# Altium PCB carrier_board.PcbDoc (part 3 of 18)
Units mm, origin at the board's own origin, x right, y up, seen from the top; angles counter-clockwise.
Board outline 146 x 102 mm, 20 copper layers (F.Cu, F.Mask, B.Cu, B.Mask, In1.Cu, F.SilkS, In2.Cu, B.SilkS, F.Adhes, B.Adhes, F.Paste, B.Paste, Dwgs.User, Cmts.User, Eco1.User, Eco2.User, Edge.Cuts, Margin, B.CrtYd, F.CrtYd); 256 components, 384 nets, 1262 pads, 1024 vias.
Unrouted connection lines stored in the file: 117.
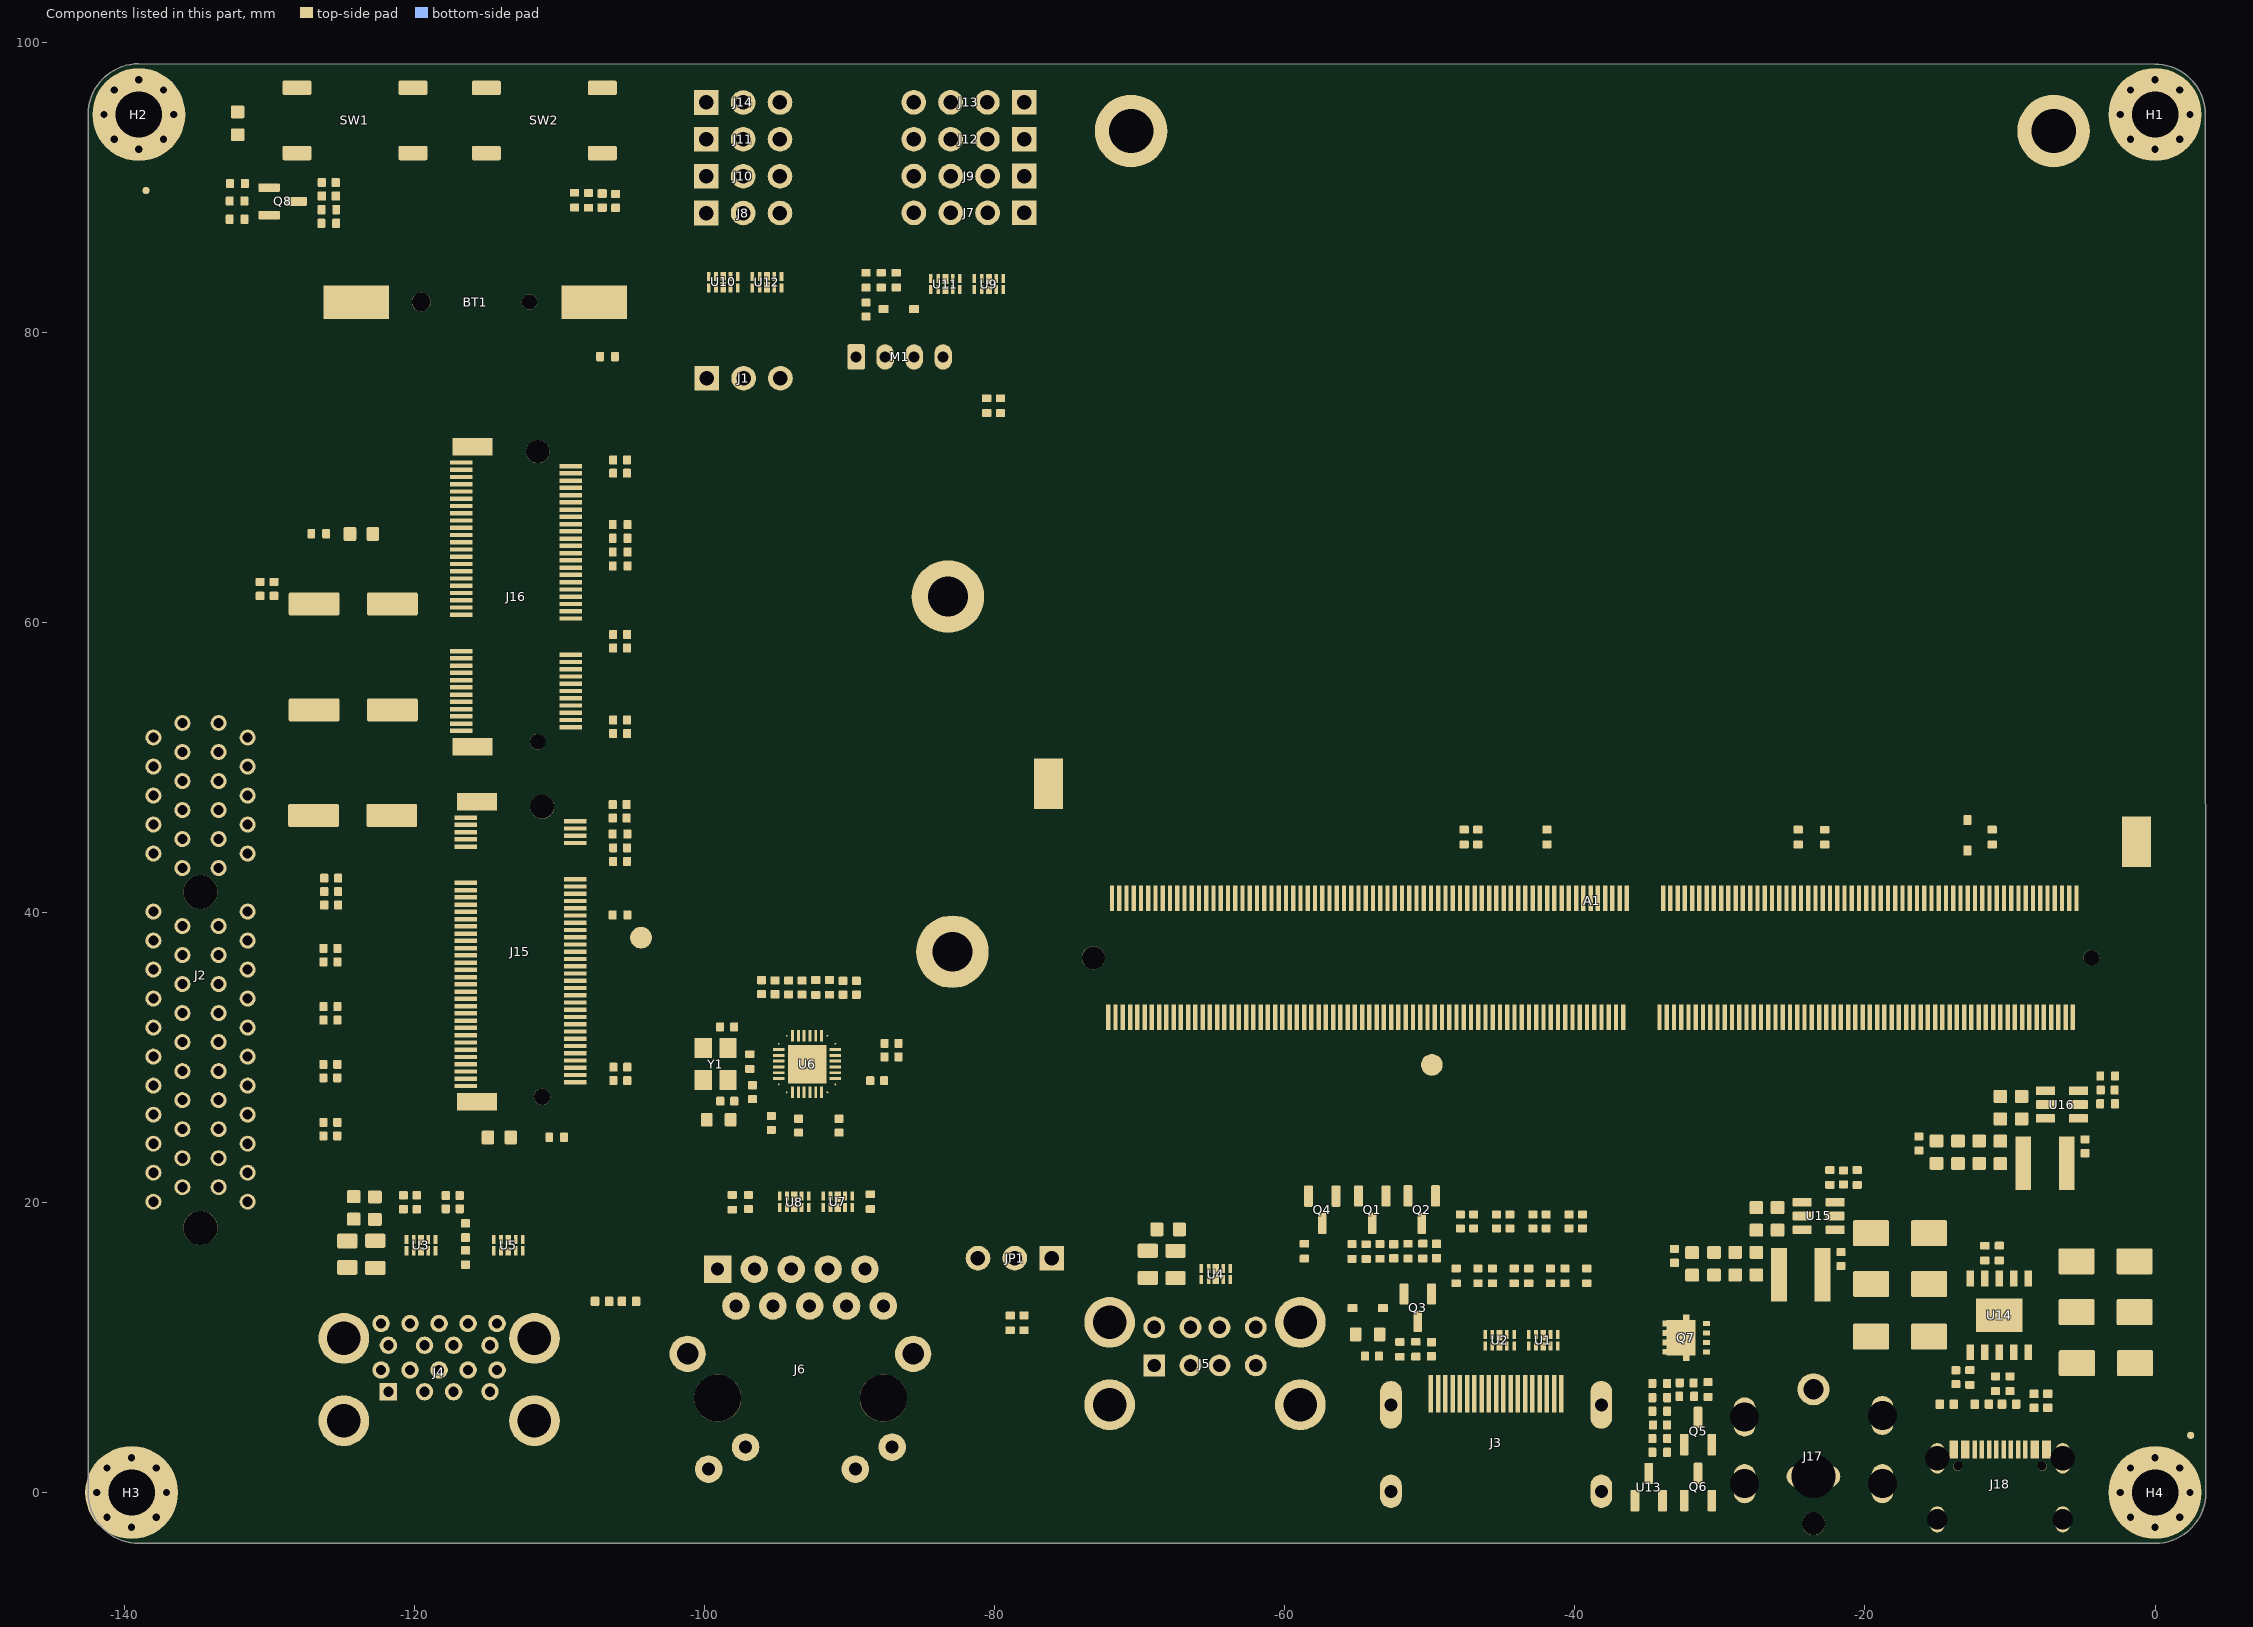
[diagram p14: the components of this part, seen from the top]

## Design rules (kind name [scope] priority, off if disabled: settings) (continued)
PolygonConnect Polygon_F.Cu-/USB2.0&USB3.0/CON_USB3_SSRX_N-2_ConnectDirect [IsNamedPolygon('F.Cu-/USB2.0&USB3.0/CON_USB3_SSRX_N-2')] p420: connectstyle=Direct reliefconductorwidth=0.254 reliefentries=4 polygonreliefangle="90 Angle" airgapwidth=0.254
PolygonConnect Polygon_F.Cu-Net-(D11-A2)-1_ConnectDirect [IsNamedPolygon('F.Cu-Net-(D11-A2)-1')] p421: connectstyle=Direct reliefconductorwidth=0.254 reliefentries=4 polygonreliefangle="90 Angle" airgapwidth=0.254
PolygonConnect Polygon_F.Cu-/HDMI/TMDS_D2--6_ConnectDirect [IsNamedPolygon('F.Cu-/HDMI/TMDS_D2--6')] p422: connectstyle=Direct reliefconductorwidth=0.254 reliefentries=4 polygonreliefangle="90 Angle" airgapwidth=0.254
PolygonConnect Polygon_F.Cu-Net-(Q7-G)-7_ConnectDirect [IsNamedPolygon('F.Cu-Net-(Q7-G)-7')] p423: connectstyle=Direct reliefconductorwidth=0.254 reliefentries=4 polygonreliefangle="90 Angle" airgapwidth=0.254
PolygonConnect "Polygon_F.Cu-/LattePanda Module/HSIO_3_RX+-2_ConnectDirect" [IsNamedPolygon('F.Cu-/LattePanda Module/HSIO_3_RX+-2')] p424: connectstyle=Direct reliefconductorwidth=0.254 reliefentries=4 polygonreliefangle="90 Angle" airgapwidth=0.254
PolygonConnect Polygon_F.Cu-Net-(D22-A)-1_ConnectDirect [IsNamedPolygon('F.Cu-Net-(D22-A)-1')] p425: connectstyle=Direct reliefconductorwidth=0.254 reliefentries=4 polygonreliefangle="90 Angle" airgapwidth=0.254
PolygonConnect Polygon_F.Cu-/USB2.0&USB3.0/CON_USB3_SSTX_N-2_ConnectDirect [IsNamedPolygon('F.Cu-/USB2.0&USB3.0/CON_USB3_SSTX_N-2')] p426: connectstyle=Direct reliefconductorwidth=0.254 reliefentries=4 polygonreliefangle="90 Angle" airgapwidth=0.254
PolygonConnect Polygon_F.Cu-/HDMI/TMDS_CK+-6_ConnectDirect [IsNamedPolygon('F.Cu-/HDMI/TMDS_CK+-6')] p427: connectstyle=Direct reliefconductorwidth=0.254 reliefentries=4 polygonreliefangle="90 Angle" airgapwidth=0.254
PolygonConnect "Polygon_F.Cu-/LattePanda Module/HSIO_0_TX+-2_ConnectDirect" [IsNamedPolygon('F.Cu-/LattePanda Module/HSIO_0_TX+-2')] p428: connectstyle=Direct reliefconductorwidth=0.254 reliefentries=4 polygonreliefangle="90 Angle" airgapwidth=0.254
PolygonConnect Polygon_F.Cu-Net-(D25-A2)-4_ConnectDirect [IsNamedPolygon('F.Cu-Net-(D25-A2)-4')] p429: connectstyle=Direct reliefconductorwidth=0.254 reliefentries=4 polygonreliefangle="90 Angle" airgapwidth=0.254
PolygonConnect "Polygon_F.Cu-/LattePanda Module/HSIO_0_TX--2_ConnectDirect" [IsNamedPolygon('F.Cu-/LattePanda Module/HSIO_0_TX--2')] p430: connectstyle=Direct reliefconductorwidth=0.254 reliefentries=4 polygonreliefangle="90 Angle" airgapwidth=0.254
PolygonConnect "Polygon_F.Cu-/LattePanda Module/HSIO_2_RX+-2_ConnectDirect" [IsNamedPolygon('F.Cu-/LattePanda Module/HSIO_2_RX+-2')] p431: connectstyle=Direct reliefconductorwidth=0.254 reliefentries=4 polygonreliefangle="90 Angle" airgapwidth=0.254
PolygonConnect Polygon_F.Cu-/USB2.0&USB3.0/CON_USB1_D_N-2_ConnectDirect [IsNamedPolygon('F.Cu-/USB2.0&USB3.0/CON_USB1_D_N-2')] p432: connectstyle=Direct reliefconductorwidth=0.254 reliefentries=4 polygonreliefangle="90 Angle" airgapwidth=0.254
PolygonConnect Polygon_F.Cu-/~{PWR_LED}{slash}~{PSON}-4_ConnectDirect [IsNamedPolygon('F.Cu-/~{PWR_LED}{slash}~{PSON}-4')] p433: connectstyle=Direct reliefconductorwidth=0.254 reliefentries=4 polygonreliefangle="90 Angle" airgapwidth=0.254
PolygonConnect Polygon_F.Cu-Net-(M1-PWM)-1_ConnectDirect [IsNamedPolygon('F.Cu-Net-(M1-PWM)-1')] p434: connectstyle=Direct reliefconductorwidth=0.254 reliefentries=4 polygonreliefangle="90 Angle" airgapwidth=0.254
PolygonConnect Polygon_F.Cu-Net-(Q7-G)-6_ConnectDirect [IsNamedPolygon('F.Cu-Net-(Q7-G)-6')] p435: connectstyle=Direct reliefconductorwidth=0.254 reliefentries=4 polygonreliefangle="90 Angle" airgapwidth=0.254
PolygonConnect Polygon_F.Cu-/~{PLT_RST}-7_ConnectDirect [IsNamedPolygon('F.Cu-/~{PLT_RST}-7')] p436: connectstyle=Direct reliefconductorwidth=0.254 reliefentries=4 polygonreliefangle="90 Angle" airgapwidth=0.254
PolygonConnect Polygon_F.Cu-GND-161_ConnectDirect [IsNamedPolygon('F.Cu-GND-161')] p437: connectstyle=Direct reliefconductorwidth=0.254 reliefentries=4 polygonreliefangle="90 Angle" airgapwidth=0.254
PolygonConnect Polygon_F.Cu-GND-160_ConnectDirect [IsNamedPolygon('F.Cu-GND-160')] p438: connectstyle=Direct reliefconductorwidth=0.254 reliefentries=4 polygonreliefangle="90 Angle" airgapwidth=0.254
PolygonConnect Polygon_F.Cu-GND-159_ConnectDirect [IsNamedPolygon('F.Cu-GND-159')] p439: connectstyle=Direct reliefconductorwidth=0.254 reliefentries=4 polygonreliefangle="90 Angle" airgapwidth=0.254
PolygonConnect Polygon_F.Cu-/USB2.0&USB3.0/CON_USB4_SSTX_N-4_ConnectDirect [IsNamedPolygon('F.Cu-/USB2.0&USB3.0/CON_USB4_SSTX_N-4')] p440: connectstyle=Direct reliefconductorwidth=0.254 reliefentries=4 polygonreliefangle="90 Angle" airgapwidth=0.254
PolygonConnect Polygon_F.Cu-GND-158_ConnectDirect [IsNamedPolygon('F.Cu-GND-158')] p441: connectstyle=Direct reliefconductorwidth=0.254 reliefentries=4 polygonreliefangle="90 Angle" airgapwidth=0.254
PolygonConnect Polygon_F.Cu-+1V0-16_ConnectDirect [IsNamedPolygon('F.Cu-+1V0-16')] p442: connectstyle=Direct reliefconductorwidth=0.254 reliefentries=4 polygonreliefangle="90 Angle" airgapwidth=0.254
PolygonConnect Polygon_F.Cu-+1V0-15_ConnectDirect [IsNamedPolygon('F.Cu-+1V0-15')] p443: connectstyle=Direct reliefconductorwidth=0.254 reliefentries=4 polygonreliefangle="90 Angle" airgapwidth=0.254
PolygonConnect Polygon_F.Cu-GND-157_ConnectDirect [IsNamedPolygon('F.Cu-GND-157')] p444: connectstyle=Direct reliefconductorwidth=0.254 reliefentries=4 polygonreliefangle="90 Angle" airgapwidth=0.254
PolygonConnect "Polygon_F.Cu-/PCIe x4/PCIE30_TX1_N_ConnectDirect" [IsNamedPolygon('F.Cu-/PCIe x4/PCIE30_TX1_N')] p445: connectstyle=Direct reliefconductorwidth=0.254 reliefentries=4 polygonreliefangle="90 Angle" airgapwidth=0.254
PolygonConnect Polygon_F.Cu-VPullup-5_ConnectDirect [IsNamedPolygon('F.Cu-VPullup-5')] p446: connectstyle=Direct reliefconductorwidth=0.254 reliefentries=4 polygonreliefangle="90 Angle" airgapwidth=0.254
PolygonConnect "Polygon_F.Cu-/LattePanda Module/HSIO_3_RX+-1_ConnectDirect" [IsNamedPolygon('F.Cu-/LattePanda Module/HSIO_3_RX+-1')] p447: connectstyle=Direct reliefconductorwidth=0.254 reliefentries=4 polygonreliefangle="90 Angle" airgapwidth=0.254
PolygonConnect Polygon_F.Cu-+12V-7_ConnectDirect [IsNamedPolygon('F.Cu-+12V-7')] p448: connectstyle=Direct reliefconductorwidth=0.254 reliefentries=4 polygonreliefangle="90 Angle" airgapwidth=0.254
PolygonConnect Polygon_F.Cu-/HDMI/TMDS_CK--5_ConnectDirect [IsNamedPolygon('F.Cu-/HDMI/TMDS_CK--5')] p449: connectstyle=Direct reliefconductorwidth=0.254 reliefentries=4 polygonreliefangle="90 Angle" airgapwidth=0.254
PolygonConnect Polygon_F.Cu-/PSU/CC2-4_ConnectDirect [IsNamedPolygon('F.Cu-/PSU/CC2-4')] p450: connectstyle=Direct reliefconductorwidth=0.254 reliefentries=4 polygonreliefangle="90 Angle" airgapwidth=0.254
PolygonConnect Polygon_F.Cu-/HDMI/DDI_B_DDC_SDA-3_ConnectDirect [IsNamedPolygon('F.Cu-/HDMI/DDI_B_DDC_SDA-3')] p451: connectstyle=Direct reliefconductorwidth=0.254 reliefentries=4 polygonreliefangle="90 Angle" airgapwidth=0.254
PolygonConnect Polygon_F.Cu-/PSU/CC2-3_ConnectDirect [IsNamedPolygon('F.Cu-/PSU/CC2-3')] p452: connectstyle=Direct reliefconductorwidth=0.254 reliefentries=4 polygonreliefangle="90 Angle" airgapwidth=0.254
PolygonConnect Polygon_F.Cu-/GPIO/I2C5_SCL-2_ConnectDirect [IsNamedPolygon('F.Cu-/GPIO/I2C5_SCL-2')] p453: connectstyle=Direct reliefconductorwidth=0.254 reliefentries=4 polygonreliefangle="90 Angle" airgapwidth=0.254
PolygonConnect "Polygon_F.Cu-/LattePanda Module/HSIO_2_RX--1_ConnectDirect" [IsNamedPolygon('F.Cu-/LattePanda Module/HSIO_2_RX--1')] p454: connectstyle=Direct reliefconductorwidth=0.254 reliefentries=4 polygonreliefangle="90 Angle" airgapwidth=0.254
PolygonConnect Polygon_F.Cu-Net-(U15-FB)-2_ConnectDirect [IsNamedPolygon('F.Cu-Net-(U15-FB)-2')] p455: connectstyle=Direct reliefconductorwidth=0.254 reliefentries=4 polygonreliefangle="90 Angle" airgapwidth=0.254
PolygonConnect Polygon_F.Cu-/HDMI/TMDS_D0+-7_ConnectDirect [IsNamedPolygon('F.Cu-/HDMI/TMDS_D0+-7')] p456: connectstyle=Direct reliefconductorwidth=0.254 reliefentries=4 polygonreliefangle="90 Angle" airgapwidth=0.254
PolygonConnect Polygon_F.Cu-/USB2.0&USB3.0/CON_USB3_SSTX_P-3_ConnectDirect [IsNamedPolygon('F.Cu-/USB2.0&USB3.0/CON_USB3_SSTX_P-3')] p457: connectstyle=Direct reliefconductorwidth=0.254 reliefentries=4 polygonreliefangle="90 Angle" airgapwidth=0.254
PolygonConnect Polygon_F.Cu-/GPIO/I2C3_SCL-5_ConnectDirect [IsNamedPolygon('F.Cu-/GPIO/I2C3_SCL-5')] p458: connectstyle=Direct reliefconductorwidth=0.254 reliefentries=4 polygonreliefangle="90 Angle" airgapwidth=0.254
PolygonConnect Polygon_F.Cu-Net-(D26-A)-4_ConnectDirect [IsNamedPolygon('F.Cu-Net-(D26-A)-4')] p459: connectstyle=Direct reliefconductorwidth=0.254 reliefentries=4 polygonreliefangle="90 Angle" airgapwidth=0.254
PolygonConnect Polygon_F.Cu-/~{WAKE}-6_ConnectDirect [IsNamedPolygon('F.Cu-/~{WAKE}-6')] p460: connectstyle=Direct reliefconductorwidth=0.254 reliefentries=4 polygonreliefangle="90 Angle" airgapwidth=0.254
PolygonConnect Polygon_F.Cu-/HDMI/TMDS_D0--6_ConnectDirect [IsNamedPolygon('F.Cu-/HDMI/TMDS_D0--6')] p461: connectstyle=Direct reliefconductorwidth=0.254 reliefentries=4 polygonreliefangle="90 Angle" airgapwidth=0.254
PolygonConnect Polygon_F.Cu-Net-(U6-RSET)_ConnectDirect [IsNamedPolygon('F.Cu-Net-(U6-RSET)')] p462: connectstyle=Direct reliefconductorwidth=0.254 reliefentries=4 polygonreliefangle="90 Angle" airgapwidth=0.254
PolygonConnect Polygon_F.Cu-Net-(D25-A2)-3_ConnectDirect [IsNamedPolygon('F.Cu-Net-(D25-A2)-3')] p463: connectstyle=Direct reliefconductorwidth=0.254 reliefentries=4 polygonreliefangle="90 Angle" airgapwidth=0.254
PolygonConnect Polygon_F.Cu-+3V3-68_ConnectDirect [IsNamedPolygon('F.Cu-+3V3-68')] p464: connectstyle=Direct reliefconductorwidth=0.254 reliefentries=4 polygonreliefangle="90 Angle" airgapwidth=0.254
PolygonConnect "Polygon_F.Cu-/M.2 E&M Key/CON_PCIE_TX_0--1_ConnectDirect" [IsNamedPolygon('F.Cu-/M.2 E&M Key/CON_PCIE_TX_0--1')] p465: connectstyle=Direct reliefconductorwidth=0.254 reliefentries=4 polygonreliefangle="90 Angle" airgapwidth=0.254
PolygonConnect Polygon_F.Cu-/GPIO/SOC_UART0_TX-2_ConnectDirect [IsNamedPolygon('F.Cu-/GPIO/SOC_UART0_TX-2')] p466: connectstyle=Direct reliefconductorwidth=0.254 reliefentries=4 polygonreliefangle="90 Angle" airgapwidth=0.254
PolygonConnect Polygon_F.Cu-/GPIO/SOC_UART0_TX-1_ConnectDirect [IsNamedPolygon('F.Cu-/GPIO/SOC_UART0_TX-1')] p467: connectstyle=Direct reliefconductorwidth=0.254 reliefentries=4 polygonreliefangle="90 Angle" airgapwidth=0.254
PolygonConnect Polygon_F.Cu-Net-(U6-CKXTAL1)-4_ConnectDirect [IsNamedPolygon('F.Cu-Net-(U6-CKXTAL1)-4')] p468: connectstyle=Direct reliefconductorwidth=0.254 reliefentries=4 polygonreliefangle="90 Angle" airgapwidth=0.254
PolygonConnect Polygon_F.Cu-/GPIO/SOC_UART1_TX-4_ConnectDirect [IsNamedPolygon('F.Cu-/GPIO/SOC_UART1_TX-4')] p469: connectstyle=Direct reliefconductorwidth=0.254 reliefentries=4 polygonreliefangle="90 Angle" airgapwidth=0.254
PolygonConnect "Polygon_F.Cu-/LattePanda Module/HSIO_2_RX-_ConnectDirect" [IsNamedPolygon('F.Cu-/LattePanda Module/HSIO_2_RX-')] p470: connectstyle=Direct reliefconductorwidth=0.254 reliefentries=4 polygonreliefangle="90 Angle" airgapwidth=0.254
PolygonConnect Polygon_F.Cu-GND-156_ConnectDirect [IsNamedPolygon('F.Cu-GND-156')] p471: connectstyle=Direct reliefconductorwidth=0.254 reliefentries=4 polygonreliefangle="90 Angle" airgapwidth=0.254
PolygonConnect Polygon_F.Cu-/GPIO/I2C2_SDA-2_ConnectDirect [IsNamedPolygon('F.Cu-/GPIO/I2C2_SDA-2')] p472: connectstyle=Direct reliefconductorwidth=0.254 reliefentries=4 polygonreliefangle="90 Angle" airgapwidth=0.254
PolygonConnect Polygon_F.Cu-+BATT-2_ConnectDirect [IsNamedPolygon('F.Cu-+BATT-2')] p473: connectstyle=Direct reliefconductorwidth=0.254 reliefentries=4 polygonreliefangle="90 Angle" airgapwidth=0.254
PolygonConnect "Polygon_F.Cu-/M.2 E&M Key/CON_PCIE_TX_1+-1_ConnectDirect" [IsNamedPolygon('F.Cu-/M.2 E&M Key/CON_PCIE_TX_1+-1')] p474: connectstyle=Direct reliefconductorwidth=0.254 reliefentries=4 polygonreliefangle="90 Angle" airgapwidth=0.254
PolygonConnect Polygon_F.Cu-Net-(J15-DEVSLP)-1_ConnectDirect [IsNamedPolygon('F.Cu-Net-(J15-DEVSLP)-1')] p475: connectstyle=Direct reliefconductorwidth=0.254 reliefentries=4 polygonreliefangle="90 Angle" airgapwidth=0.254
PolygonConnect Polygon_F.Cu-GND-155_ConnectDirect [IsNamedPolygon('F.Cu-GND-155')] p476: connectstyle=Direct reliefconductorwidth=0.254 reliefentries=4 polygonreliefangle="90 Angle" airgapwidth=0.254
PolygonConnect Polygon_F.Cu-GND-154_ConnectDirect [IsNamedPolygon('F.Cu-GND-154')] p477: connectstyle=Direct reliefconductorwidth=0.254 reliefentries=4 polygonreliefangle="90 Angle" airgapwidth=0.254
PolygonConnect Polygon_F.Cu-+3V3-67_ConnectDirect [IsNamedPolygon('F.Cu-+3V3-67')] p478: connectstyle=Direct reliefconductorwidth=0.254 reliefentries=4 polygonreliefangle="90 Angle" airgapwidth=0.254
PolygonConnect Polygon_F.Cu-Net-(U6-CKXTAL1)-3_ConnectDirect [IsNamedPolygon('F.Cu-Net-(U6-CKXTAL1)-3')] p479: connectstyle=Direct reliefconductorwidth=0.254 reliefentries=4 polygonreliefangle="90 Angle" airgapwidth=0.254
PolygonConnect Polygon_F.Cu-/PSU/CC1-5_ConnectDirect [IsNamedPolygon('F.Cu-/PSU/CC1-5')] p480: connectstyle=Direct reliefconductorwidth=0.254 reliefentries=4 polygonreliefangle="90 Angle" airgapwidth=0.254
PolygonConnect "Polygon_F.Cu-/Gigabit Ethernet/GbE_PCIe_CLK+-2_ConnectDirect" [IsNamedPolygon('F.Cu-/Gigabit Ethernet/GbE_PCIe_CLK+-2')] p481: connectstyle=Direct reliefconductorwidth=0.254 reliefentries=4 polygonreliefangle="90 Angle" airgapwidth=0.254
PolygonConnect Polygon_F.Cu-GND-153_ConnectDirect [IsNamedPolygon('F.Cu-GND-153')] p482: connectstyle=Direct reliefconductorwidth=0.254 reliefentries=4 polygonreliefangle="90 Angle" airgapwidth=0.254
PolygonConnect "Polygon_F.Cu-/Gigabit Ethernet/GbE_PCIe_RX--2_ConnectDirect" [IsNamedPolygon('F.Cu-/Gigabit Ethernet/GbE_PCIe_RX--2')] p483: connectstyle=Direct reliefconductorwidth=0.254 reliefentries=4 polygonreliefangle="90 Angle" airgapwidth=0.254
PolygonConnect Polygon_F.Cu-GND-152_ConnectDirect [IsNamedPolygon('F.Cu-GND-152')] p484: connectstyle=Direct reliefconductorwidth=0.254 reliefentries=4 polygonreliefangle="90 Angle" airgapwidth=0.254
PolygonConnect Polygon_F.Cu-+3V3-66_ConnectDirect [IsNamedPolygon('F.Cu-+3V3-66')] p485: connectstyle=Direct reliefconductorwidth=0.254 reliefentries=4 polygonreliefangle="90 Angle" airgapwidth=0.254
PolygonConnect Polygon_F.Cu-GND-151_ConnectDirect [IsNamedPolygon('F.Cu-GND-151')] p486: connectstyle=Direct reliefconductorwidth=0.254 reliefentries=4 polygonreliefangle="90 Angle" airgapwidth=0.254
PolygonConnect Polygon_F.Cu-/HDMI/TMDS_D2--5_ConnectDirect [IsNamedPolygon('F.Cu-/HDMI/TMDS_D2--5')] p487: connectstyle=Direct reliefconductorwidth=0.254 reliefentries=4 polygonreliefangle="90 Angle" airgapwidth=0.254
PolygonConnect Polygon_F.Cu-+3V3-65_ConnectDirect [IsNamedPolygon('F.Cu-+3V3-65')] p488: connectstyle=Direct reliefconductorwidth=0.254 reliefentries=4 polygonreliefangle="90 Angle" airgapwidth=0.254
PolygonConnect Polygon_F.Cu-+3V3-64_ConnectDirect [IsNamedPolygon('F.Cu-+3V3-64')] p489: connectstyle=Direct reliefconductorwidth=0.254 reliefentries=4 polygonreliefangle="90 Angle" airgapwidth=0.254
PolygonConnect Polygon_F.Cu-Net-(U13-K)-2_ConnectDirect [IsNamedPolygon('F.Cu-Net-(U13-K)-2')] p490: connectstyle=Direct reliefconductorwidth=0.254 reliefentries=4 polygonreliefangle="90 Angle" airgapwidth=0.254
PolygonConnect Polygon_F.Cu-/USB2.0&USB3.0/CON_USB4_D_P-4_ConnectDirect [IsNamedPolygon('F.Cu-/USB2.0&USB3.0/CON_USB4_D_P-4')] p491: connectstyle=Direct reliefconductorwidth=0.254 reliefentries=4 polygonreliefangle="90 Angle" airgapwidth=0.254
PolygonConnect "Polygon_F.Cu-/M.2 E&M Key/CON_PCIE_TX_0+-1_ConnectDirect" [IsNamedPolygon('F.Cu-/M.2 E&M Key/CON_PCIE_TX_0+-1')] p492: connectstyle=Direct reliefconductorwidth=0.254 reliefentries=4 polygonreliefangle="90 Angle" airgapwidth=0.254
PolygonConnect "Polygon_F.Cu-/LattePanda Module/HSIO_2_TX--2_ConnectDirect" [IsNamedPolygon('F.Cu-/LattePanda Module/HSIO_2_TX--2')] p493: connectstyle=Direct reliefconductorwidth=0.254 reliefentries=4 polygonreliefangle="90 Angle" airgapwidth=0.254
PolygonConnect Polygon_F.Cu-/~{PWR_LED}{slash}~{PSON}-3_ConnectDirect [IsNamedPolygon('F.Cu-/~{PWR_LED}{slash}~{PSON}-3')] p494: connectstyle=Direct reliefconductorwidth=0.254 reliefentries=4 polygonreliefangle="90 Angle" airgapwidth=0.254
PolygonConnect Polygon_F.Cu-GND-150_ConnectDirect [IsNamedPolygon('F.Cu-GND-150')] p495: connectstyle=Direct reliefconductorwidth=0.254 reliefentries=4 polygonreliefangle="90 Angle" airgapwidth=0.254
PolygonConnect Polygon_F.Cu-+1V0-14_ConnectDirect [IsNamedPolygon('F.Cu-+1V0-14')] p496: connectstyle=Direct reliefconductorwidth=0.254 reliefentries=4 polygonreliefangle="90 Angle" airgapwidth=0.254
PolygonConnect Polygon_F.Cu-+3V3-63_ConnectDirect [IsNamedPolygon('F.Cu-+3V3-63')] p497: connectstyle=Direct reliefconductorwidth=0.254 reliefentries=4 polygonreliefangle="90 Angle" airgapwidth=0.254
PolygonConnect "Polygon_F.Cu-/LattePanda Module/HSIO_11_RX+_ConnectDirect" [IsNamedPolygon('F.Cu-/LattePanda Module/HSIO_11_RX+')] p498: connectstyle=Direct reliefconductorwidth=0.254 reliefentries=4 polygonreliefangle="90 Angle" airgapwidth=0.254
PolygonConnect "Polygon_F.Cu-/LattePanda Module/HSIO_8_RX+_ConnectDirect" [IsNamedPolygon('F.Cu-/LattePanda Module/HSIO_8_RX+')] p499: connectstyle=Direct reliefconductorwidth=0.254 reliefentries=4 polygonreliefangle="90 Angle" airgapwidth=0.254
PolygonConnect Polygon_F.Cu-Net-(J6-PadL3)_ConnectDirect [IsNamedPolygon('F.Cu-Net-(J6-PadL3)')] p500: connectstyle=Direct reliefconductorwidth=0.254 reliefentries=4 polygonreliefangle="90 Angle" airgapwidth=0.254
PolygonConnect Polygon_F.Cu-GND-149_ConnectDirect [IsNamedPolygon('F.Cu-GND-149')] p501: connectstyle=Direct reliefconductorwidth=0.254 reliefentries=4 polygonreliefangle="90 Angle" airgapwidth=0.254
PolygonConnect "Polygon_F.Cu-/LattePanda Module/REFCLK2--1_ConnectDirect" [IsNamedPolygon('F.Cu-/LattePanda Module/REFCLK2--1')] p502: connectstyle=Direct reliefconductorwidth=0.254 reliefentries=4 polygonreliefangle="90 Angle" airgapwidth=0.254
PolygonConnect Polygon_F.Cu-GND-148_ConnectDirect [IsNamedPolygon('F.Cu-GND-148')] p503: connectstyle=Direct reliefconductorwidth=0.254 reliefentries=4 polygonreliefangle="90 Angle" airgapwidth=0.254
PolygonConnect Polygon_F.Cu-+3V3-62_ConnectDirect [IsNamedPolygon('F.Cu-+3V3-62')] p504: connectstyle=Direct reliefconductorwidth=0.254 reliefentries=4 polygonreliefangle="90 Angle" airgapwidth=0.254
PolygonConnect Polygon_F.Cu-/HDMI/TMDS_D2+-6_ConnectDirect [IsNamedPolygon('F.Cu-/HDMI/TMDS_D2+-6')] p505: connectstyle=Direct reliefconductorwidth=0.254 reliefentries=4 polygonreliefangle="90 Angle" airgapwidth=0.254
PolygonConnect "Polygon_F.Cu-/LattePanda Module/HSIO_1_TX--1_ConnectDirect" [IsNamedPolygon('F.Cu-/LattePanda Module/HSIO_1_TX--1')] p506: connectstyle=Direct reliefconductorwidth=0.254 reliefentries=4 polygonreliefangle="90 Angle" airgapwidth=0.254
PolygonConnect Polygon_F.Cu-GND-147_ConnectDirect [IsNamedPolygon('F.Cu-GND-147')] p507: connectstyle=Direct reliefconductorwidth=0.254 reliefentries=4 polygonreliefangle="90 Angle" airgapwidth=0.254
PolygonConnect Polygon_F.Cu-GND-146_ConnectDirect [IsNamedPolygon('F.Cu-GND-146')] p508: connectstyle=Direct reliefconductorwidth=0.254 reliefentries=4 polygonreliefangle="90 Angle" airgapwidth=0.254
PolygonConnect Polygon_F.Cu-/GPIO/I2C4_SCL-3_ConnectDirect [IsNamedPolygon('F.Cu-/GPIO/I2C4_SCL-3')] p509: connectstyle=Direct reliefconductorwidth=0.254 reliefentries=4 polygonreliefangle="90 Angle" airgapwidth=0.254
PolygonConnect Polygon_F.Cu-Net-(D9-A)-1_ConnectDirect [IsNamedPolygon('F.Cu-Net-(D9-A)-1')] p510: connectstyle=Direct reliefconductorwidth=0.254 reliefentries=4 polygonreliefangle="90 Angle" airgapwidth=0.254
PolygonConnect "Polygon_F.Cu-/LattePanda Module/~{RST_SW}-2_ConnectDirect" [IsNamedPolygon('F.Cu-/LattePanda Module/~{RST_SW}-2')] p511: connectstyle=Direct reliefconductorwidth=0.254 reliefentries=4 polygonreliefangle="90 Angle" airgapwidth=0.254
PolygonConnect Polygon_F.Cu-/USB2.0&USB3.0/CON_USB4_SSRX_P-3_ConnectDirect [IsNamedPolygon('F.Cu-/USB2.0&USB3.0/CON_USB4_SSRX_P-3')] p512: connectstyle=Direct reliefconductorwidth=0.254 reliefentries=4 polygonreliefangle="90 Angle" airgapwidth=0.254
PolygonConnect Polygon_F.Cu-+3V3-61_ConnectDirect [IsNamedPolygon('F.Cu-+3V3-61')] p513: connectstyle=Direct reliefconductorwidth=0.254 reliefentries=4 polygonreliefangle="90 Angle" airgapwidth=0.254
PolygonConnect Polygon_F.Cu-GND-145_ConnectDirect [IsNamedPolygon('F.Cu-GND-145')] p514: connectstyle=Direct reliefconductorwidth=0.254 reliefentries=4 polygonreliefangle="90 Angle" airgapwidth=0.254
PolygonConnect Polygon_F.Cu-/GPIO/I2C3_SDA-2_ConnectDirect [IsNamedPolygon('F.Cu-/GPIO/I2C3_SDA-2')] p515: connectstyle=Direct reliefconductorwidth=0.254 reliefentries=4 polygonreliefangle="90 Angle" airgapwidth=0.254
PolygonConnect "Polygon_F.Cu-/LattePanda Module/HSIO_11_TX--1_ConnectDirect" [IsNamedPolygon('F.Cu-/LattePanda Module/HSIO_11_TX--1')] p516: connectstyle=Direct reliefconductorwidth=0.254 reliefentries=4 polygonreliefangle="90 Angle" airgapwidth=0.254
PolygonConnect Polygon_F.Cu-/GPIO/I2C2_SCL-4_ConnectDirect [IsNamedPolygon('F.Cu-/GPIO/I2C2_SCL-4')] p517: connectstyle=Direct reliefconductorwidth=0.254 reliefentries=4 polygonreliefangle="90 Angle" airgapwidth=0.254
PolygonConnect Polygon_F.Cu-GND-144_ConnectDirect [IsNamedPolygon('F.Cu-GND-144')] p518: connectstyle=Direct reliefconductorwidth=0.254 reliefentries=4 polygonreliefangle="90 Angle" airgapwidth=0.254
PolygonConnect Polygon_F.Cu-/HDMI/DDI_B_DDC_SDA-2_ConnectDirect [IsNamedPolygon('F.Cu-/HDMI/DDI_B_DDC_SDA-2')] p519: connectstyle=Direct reliefconductorwidth=0.254 reliefentries=4 polygonreliefangle="90 Angle" airgapwidth=0.254
PolygonConnect Polygon_F.Cu-GND-143_ConnectDirect [IsNamedPolygon('F.Cu-GND-143')] p520: connectstyle=Direct reliefconductorwidth=0.254 reliefentries=4 polygonreliefangle="90 Angle" airgapwidth=0.254
PolygonConnect Polygon_F.Cu-/HDMI/TMDS_D1+-7_ConnectDirect [IsNamedPolygon('F.Cu-/HDMI/TMDS_D1+-7')] p521: connectstyle=Direct reliefconductorwidth=0.254 reliefentries=4 polygonreliefangle="90 Angle" airgapwidth=0.254
PolygonConnect Polygon_F.Cu-GND-142_ConnectDirect [IsNamedPolygon('F.Cu-GND-142')] p522: connectstyle=Direct reliefconductorwidth=0.254 reliefentries=4 polygonreliefangle="90 Angle" airgapwidth=0.254
PolygonConnect "Polygon_F.Cu-/LattePanda Module/HSIO_0_TX+-1_ConnectDirect" [IsNamedPolygon('F.Cu-/LattePanda Module/HSIO_0_TX+-1')] p523: connectstyle=Direct reliefconductorwidth=0.254 reliefentries=4 polygonreliefangle="90 Angle" airgapwidth=0.254
PolygonConnect Polygon_F.Cu-/USB2.0&USB3.0/CON_USB3_D_P-4_ConnectDirect [IsNamedPolygon('F.Cu-/USB2.0&USB3.0/CON_USB3_D_P-4')] p524: connectstyle=Direct reliefconductorwidth=0.254 reliefentries=4 polygonreliefangle="90 Angle" airgapwidth=0.254
PolygonConnect "Polygon_F.Cu-/LattePanda Module/HSIO_1_TX-_ConnectDirect" [IsNamedPolygon('F.Cu-/LattePanda Module/HSIO_1_TX-')] p525: connectstyle=Direct reliefconductorwidth=0.254 reliefentries=4 polygonreliefangle="90 Angle" airgapwidth=0.254
PolygonConnect Polygon_F.Cu-/HDMI/DDI_B_DDC_SDA-1_ConnectDirect [IsNamedPolygon('F.Cu-/HDMI/DDI_B_DDC_SDA-1')] p526: connectstyle=Direct reliefconductorwidth=0.254 reliefentries=4 polygonreliefangle="90 Angle" airgapwidth=0.254
PolygonConnect Polygon_F.Cu-Net-(U6-CKXTAL2)-4_ConnectDirect [IsNamedPolygon('F.Cu-Net-(U6-CKXTAL2)-4')] p527: connectstyle=Direct reliefconductorwidth=0.254 reliefentries=4 polygonreliefangle="90 Angle" airgapwidth=0.254
PolygonConnect Polygon_F.Cu-/PSU/PWR_EN-7_ConnectDirect [IsNamedPolygon('F.Cu-/PSU/PWR_EN-7')] p528: connectstyle=Direct reliefconductorwidth=0.254 reliefentries=4 polygonreliefangle="90 Angle" airgapwidth=0.254
PolygonConnect "Polygon_F.Cu-/PCIe x4/PCIE30_TX3_P-1_ConnectDirect" [IsNamedPolygon('F.Cu-/PCIe x4/PCIE30_TX3_P-1')] p529: connectstyle=Direct reliefconductorwidth=0.254 reliefentries=4 polygonreliefangle="90 Angle" airgapwidth=0.254
PolygonConnect Polygon_F.Cu-+1V0-13_ConnectDirect [IsNamedPolygon('F.Cu-+1V0-13')] p530: connectstyle=Direct reliefconductorwidth=0.254 reliefentries=4 polygonreliefangle="90 Angle" airgapwidth=0.254
PolygonConnect Polygon_F.Cu-/PSU/PWR_EN-6_ConnectDirect [IsNamedPolygon('F.Cu-/PSU/PWR_EN-6')] p531: connectstyle=Direct reliefconductorwidth=0.254 reliefentries=4 polygonreliefangle="90 Angle" airgapwidth=0.254
PolygonConnect Polygon_F.Cu-/PSU/CC2-2_ConnectDirect [IsNamedPolygon('F.Cu-/PSU/CC2-2')] p532: connectstyle=Direct reliefconductorwidth=0.254 reliefentries=4 polygonreliefangle="90 Angle" airgapwidth=0.254
PolygonConnect "Polygon_F.Cu-/Gigabit Ethernet/GbE_PCIe_CLK+-1_ConnectDirect" [IsNamedPolygon('F.Cu-/Gigabit Ethernet/GbE_PCIe_CLK+-1')] p533: connectstyle=Direct reliefconductorwidth=0.254 reliefentries=4 polygonreliefangle="90 Angle" airgapwidth=0.254
PolygonConnect Polygon_F.Cu-/HDMI/TMDS_CK--4_ConnectDirect [IsNamedPolygon('F.Cu-/HDMI/TMDS_CK--4')] p534: connectstyle=Direct reliefconductorwidth=0.254 reliefentries=4 polygonreliefangle="90 Angle" airgapwidth=0.254
PolygonConnect Polygon_F.Cu-/~{WAKE}-5_ConnectDirect [IsNamedPolygon('F.Cu-/~{WAKE}-5')] p535: connectstyle=Direct reliefconductorwidth=0.254 reliefentries=4 polygonreliefangle="90 Angle" airgapwidth=0.254
PolygonConnect "Polygon_F.Cu-/LattePanda Module/REFCLK2+-2_ConnectDirect" [IsNamedPolygon('F.Cu-/LattePanda Module/REFCLK2+-2')] p536: connectstyle=Direct reliefconductorwidth=0.254 reliefentries=4 polygonreliefangle="90 Angle" airgapwidth=0.254
PolygonConnect Polygon_F.Cu-GND-141_ConnectDirect [IsNamedPolygon('F.Cu-GND-141')] p537: connectstyle=Direct reliefconductorwidth=0.254 reliefentries=4 polygonreliefangle="90 Angle" airgapwidth=0.254
PolygonConnect "Polygon_F.Cu-/M.2 E&M Key/~{CLKREQE}-3_ConnectDirect" [IsNamedPolygon('F.Cu-/M.2 E&M Key/~{CLKREQE}-3')] p538: connectstyle=Direct reliefconductorwidth=0.254 reliefentries=4 polygonreliefangle="90 Angle" airgapwidth=0.254
PolygonConnect Polygon_F.Cu-Net-(J16-SUSCLK)-1_ConnectDirect [IsNamedPolygon('F.Cu-Net-(J16-SUSCLK)-1')] p539: connectstyle=Direct reliefconductorwidth=0.254 reliefentries=4 polygonreliefangle="90 Angle" airgapwidth=0.254
PolygonConnect "Polygon_F.Cu-/Gigabit Ethernet/HSO--1_ConnectDirect" [IsNamedPolygon('F.Cu-/Gigabit Ethernet/HSO--1')] p540: connectstyle=Direct reliefconductorwidth=0.254 reliefentries=4 polygonreliefangle="90 Angle" airgapwidth=0.254
PolygonConnect Polygon_F.Cu-GND-140_ConnectDirect [IsNamedPolygon('F.Cu-GND-140')] p541: connectstyle=Direct reliefconductorwidth=0.254 reliefentries=4 polygonreliefangle="90 Angle" airgapwidth=0.254
PolygonConnect Polygon_F.Cu-/HDMI/TMDS_D1--6_ConnectDirect [IsNamedPolygon('F.Cu-/HDMI/TMDS_D1--6')] p542: connectstyle=Direct reliefconductorwidth=0.254 reliefentries=4 polygonreliefangle="90 Angle" airgapwidth=0.254
PolygonConnect Polygon_F.Cu-/HDMI/DDI_B_TX3-_ConnectDirect [IsNamedPolygon('F.Cu-/HDMI/DDI_B_TX3-')] p543: connectstyle=Direct reliefconductorwidth=0.254 reliefentries=4 polygonreliefangle="90 Angle" airgapwidth=0.254
PolygonConnect Polygon_F.Cu-/~{WAKE}-4_ConnectDirect [IsNamedPolygon('F.Cu-/~{WAKE}-4')] p544: connectstyle=Direct reliefconductorwidth=0.254 reliefentries=4 polygonreliefangle="90 Angle" airgapwidth=0.254
PolygonConnect Polygon_F.Cu-/GPIO/SOC_UART1_TX-3_ConnectDirect [IsNamedPolygon('F.Cu-/GPIO/SOC_UART1_TX-3')] p545: connectstyle=Direct reliefconductorwidth=0.254 reliefentries=4 polygonreliefangle="90 Angle" airgapwidth=0.254
PolygonConnect Polygon_F.Cu-GND-139_ConnectDirect [IsNamedPolygon('F.Cu-GND-139')] p546: connectstyle=Direct reliefconductorwidth=0.254 reliefentries=4 polygonreliefangle="90 Angle" airgapwidth=0.254
PolygonConnect "Polygon_F.Cu-/Gigabit Ethernet/MDI0--1_ConnectDirect" [IsNamedPolygon('F.Cu-/Gigabit Ethernet/MDI0--1')] p547: connectstyle=Direct reliefconductorwidth=0.254 reliefentries=4 polygonreliefangle="90 Angle" airgapwidth=0.254
PolygonConnect "Polygon_F.Cu-/Gigabit Ethernet/MDI0+-1_ConnectDirect" [IsNamedPolygon('F.Cu-/Gigabit Ethernet/MDI0+-1')] p548: connectstyle=Direct reliefconductorwidth=0.254 reliefentries=4 polygonreliefangle="90 Angle" airgapwidth=0.254
PolygonConnect Polygon_F.Cu-5V_HDMI_VCC_ConnectDirect [IsNamedPolygon('F.Cu-5V_HDMI_VCC')] p549: connectstyle=Direct reliefconductorwidth=0.254 reliefentries=4 polygonreliefangle="90 Angle" airgapwidth=0.254
PolygonConnect Polygon_F.Cu-+12V-6_ConnectDirect [IsNamedPolygon('F.Cu-+12V-6')] p550: connectstyle=Direct reliefconductorwidth=0.254 reliefentries=4 polygonreliefangle="90 Angle" airgapwidth=0.254
PolygonConnect Polygon_F.Cu-/HDMI/TMDS_D0+-6_ConnectDirect [IsNamedPolygon('F.Cu-/HDMI/TMDS_D0+-6')] p551: connectstyle=Direct reliefconductorwidth=0.254 reliefentries=4 polygonreliefangle="90 Angle" airgapwidth=0.254
PolygonConnect Polygon_F.Cu-GND-138_ConnectDirect [IsNamedPolygon('F.Cu-GND-138')] p552: connectstyle=Direct reliefconductorwidth=0.254 reliefentries=4 polygonreliefangle="90 Angle" airgapwidth=0.254
PolygonConnect Polygon_F.Cu-Net-(Q4-D)-7_ConnectDirect [IsNamedPolygon('F.Cu-Net-(Q4-D)-7')] p553: connectstyle=Direct reliefconductorwidth=0.254 reliefentries=4 polygonreliefangle="90 Angle" airgapwidth=0.254
PolygonConnect "Polygon_F.Cu-/PCIe x4/PCIE30_TX0_N-1_ConnectDirect" [IsNamedPolygon('F.Cu-/PCIe x4/PCIE30_TX0_N-1')] p554: connectstyle=Direct reliefconductorwidth=0.254 reliefentries=4 polygonreliefangle="90 Angle" airgapwidth=0.254
PolygonConnect Polygon_F.Cu-/USB2.0&USB3.0/CON_USB4_SSTX_N-3_ConnectDirect [IsNamedPolygon('F.Cu-/USB2.0&USB3.0/CON_USB4_SSTX_N-3')] p555: connectstyle=Direct reliefconductorwidth=0.254 reliefentries=4 polygonreliefangle="90 Angle" airgapwidth=0.254
PolygonConnect Polygon_F.Cu-/HDMI/TMDS_D2+-5_ConnectDirect [IsNamedPolygon('F.Cu-/HDMI/TMDS_D2+-5')] p556: connectstyle=Direct reliefconductorwidth=0.254 reliefentries=4 polygonreliefangle="90 Angle" airgapwidth=0.254
PolygonConnect "Polygon_F.Cu-/LattePanda Module/HSIO_9_TX+-2_ConnectDirect" [IsNamedPolygon('F.Cu-/LattePanda Module/HSIO_9_TX+-2')] p557: connectstyle=Direct reliefconductorwidth=0.254 reliefentries=4 polygonreliefangle="90 Angle" airgapwidth=0.254
PolygonConnect "Polygon_F.Cu-/LattePanda Module/REFCLK2-_ConnectDirect" [IsNamedPolygon('F.Cu-/LattePanda Module/REFCLK2-')] p558: connectstyle=Direct reliefconductorwidth=0.254 reliefentries=4 polygonreliefangle="90 Angle" airgapwidth=0.254
PolygonConnect Polygon_F.Cu-Net-(U6-CKXTAL1)-2_ConnectDirect [IsNamedPolygon('F.Cu-Net-(U6-CKXTAL1)-2')] p559: connectstyle=Direct reliefconductorwidth=0.254 reliefentries=4 polygonreliefangle="90 Angle" airgapwidth=0.254
PolygonConnect Polygon_F.Cu-+3V3-60_ConnectDirect [IsNamedPolygon('F.Cu-+3V3-60')] p560: connectstyle=Direct reliefconductorwidth=0.254 reliefentries=4 polygonreliefangle="90 Angle" airgapwidth=0.254
PolygonConnect "Polygon_F.Cu-/LattePanda Module/~{PWR_SW}-2_ConnectDirect" [IsNamedPolygon('F.Cu-/LattePanda Module/~{PWR_SW}-2')] p561: connectstyle=Direct reliefconductorwidth=0.254 reliefentries=4 polygonreliefangle="90 Angle" airgapwidth=0.254
PolygonConnect Polygon_F.Cu-/HDMI/DDI_B_DDC_SDA_ConnectDirect [IsNamedPolygon('F.Cu-/HDMI/DDI_B_DDC_SDA')] p562: connectstyle=Direct reliefconductorwidth=0.254 reliefentries=4 polygonreliefangle="90 Angle" airgapwidth=0.254
PolygonConnect Polygon_F.Cu-+1V0-12_ConnectDirect [IsNamedPolygon('F.Cu-+1V0-12')] p563: connectstyle=Direct reliefconductorwidth=0.254 reliefentries=4 polygonreliefangle="90 Angle" airgapwidth=0.254
PolygonConnect Polygon_F.Cu-/PSU/CC1-4_ConnectDirect [IsNamedPolygon('F.Cu-/PSU/CC1-4')] p564: connectstyle=Direct reliefconductorwidth=0.254 reliefentries=4 polygonreliefangle="90 Angle" airgapwidth=0.254
PolygonConnect Polygon_F.Cu-/USB2.0&USB3.0/CON_USB1_D_P-4_ConnectDirect [IsNamedPolygon('F.Cu-/USB2.0&USB3.0/CON_USB1_D_P-4')] p565: connectstyle=Direct reliefconductorwidth=0.254 reliefentries=4 polygonreliefangle="90 Angle" airgapwidth=0.254
PolygonConnect Polygon_F.Cu-+3V3-59_ConnectDirect [IsNamedPolygon('F.Cu-+3V3-59')] p566: connectstyle=Direct reliefconductorwidth=0.254 reliefentries=4 polygonreliefangle="90 Angle" airgapwidth=0.254
PolygonConnect Polygon_F.Cu-Net-(Q1-D)-1_ConnectDirect [IsNamedPolygon('F.Cu-Net-(Q1-D)-1')] p567: connectstyle=Direct reliefconductorwidth=0.254 reliefentries=4 polygonreliefangle="90 Angle" airgapwidth=0.254
PolygonConnect Polygon_F.Cu-GND-137_ConnectDirect [IsNamedPolygon('F.Cu-GND-137')] p568: connectstyle=Direct reliefconductorwidth=0.254 reliefentries=4 polygonreliefangle="90 Angle" airgapwidth=0.254
PolygonConnect Polygon_F.Cu-GND-136_ConnectDirect [IsNamedPolygon('F.Cu-GND-136')] p569: connectstyle=Direct reliefconductorwidth=0.254 reliefentries=4 polygonreliefangle="90 Angle" airgapwidth=0.254
PolygonConnect "Polygon_F.Cu-/LattePanda Module/HSIO_9_RX-_ConnectDirect" [IsNamedPolygon('F.Cu-/LattePanda Module/HSIO_9_RX-')] p570: connectstyle=Direct reliefconductorwidth=0.254 reliefentries=4 polygonreliefangle="90 Angle" airgapwidth=0.254
PolygonConnect Polygon_F.Cu-+1V0-11_ConnectDirect [IsNamedPolygon('F.Cu-+1V0-11')] p571: connectstyle=Direct reliefconductorwidth=0.254 reliefentries=4 polygonreliefangle="90 Angle" airgapwidth=0.254
PolygonConnect "Polygon_F.Cu-/Gigabit Ethernet/LED1_1000-1_ConnectDirect" [IsNamedPolygon('F.Cu-/Gigabit Ethernet/LED1_1000-1')] p572: connectstyle=Direct reliefconductorwidth=0.254 reliefentries=4 polygonreliefangle="90 Angle" airgapwidth=0.254
PolygonConnect "Polygon_F.Cu-/Gigabit Ethernet/HSI--1_ConnectDirect" [IsNamedPolygon('F.Cu-/Gigabit Ethernet/HSI--1')] p573: connectstyle=Direct reliefconductorwidth=0.254 reliefentries=4 polygonreliefangle="90 Angle" airgapwidth=0.254
PolygonConnect "Polygon_F.Cu-/LattePanda Module/REFCLK0--2_ConnectDirect" [IsNamedPolygon('F.Cu-/LattePanda Module/REFCLK0--2')] p574: connectstyle=Direct reliefconductorwidth=0.254 reliefentries=4 polygonreliefangle="90 Angle" airgapwidth=0.254
PolygonConnect Polygon_F.Cu-GND-135_ConnectDirect [IsNamedPolygon('F.Cu-GND-135')] p575: connectstyle=Direct reliefconductorwidth=0.254 reliefentries=4 polygonreliefangle="90 Angle" airgapwidth=0.254
PolygonConnect Polygon_F.Cu-+3V3-58_ConnectDirect [IsNamedPolygon('F.Cu-+3V3-58')] p576: connectstyle=Direct reliefconductorwidth=0.254 reliefentries=4 polygonreliefangle="90 Angle" airgapwidth=0.254
PolygonConnect "Polygon_F.Cu-/LattePanda Module/HSIO_9_TX--2_ConnectDirect" [IsNamedPolygon('F.Cu-/LattePanda Module/HSIO_9_TX--2')] p577: connectstyle=Direct reliefconductorwidth=0.254 reliefentries=4 polygonreliefangle="90 Angle" airgapwidth=0.254
PolygonConnect Polygon_F.Cu-Net-(Q1-D)_ConnectDirect [IsNamedPolygon('F.Cu-Net-(Q1-D)')] p578: connectstyle=Direct reliefconductorwidth=0.254 reliefentries=4 polygonreliefangle="90 Angle" airgapwidth=0.254
PolygonConnect Polygon_F.Cu-+12V-5_ConnectDirect [IsNamedPolygon('F.Cu-+12V-5')] p579: connectstyle=Direct reliefconductorwidth=0.254 reliefentries=4 polygonreliefangle="90 Angle" airgapwidth=0.254
PolygonConnect Polygon_F.Cu-/HDMI/DDC_SCL-5_ConnectDirect [IsNamedPolygon('F.Cu-/HDMI/DDC_SCL-5')] p580: connectstyle=Direct reliefconductorwidth=0.254 reliefentries=4 polygonreliefangle="90 Angle" airgapwidth=0.254
PolygonConnect Polygon_F.Cu-Net-(Q7-G)-5_ConnectDirect [IsNamedPolygon('F.Cu-Net-(Q7-G)-5')] p581: connectstyle=Direct reliefconductorwidth=0.254 reliefentries=4 polygonreliefangle="90 Angle" airgapwidth=0.254
PolygonConnect Polygon_F.Cu-GND-134_ConnectDirect [IsNamedPolygon('F.Cu-GND-134')] p582: connectstyle=Direct reliefconductorwidth=0.254 reliefentries=4 polygonreliefangle="90 Angle" airgapwidth=0.254
PolygonConnect Polygon_F.Cu-+3V3-57_ConnectDirect [IsNamedPolygon('F.Cu-+3V3-57')] p583: connectstyle=Direct reliefconductorwidth=0.254 reliefentries=4 polygonreliefangle="90 Angle" airgapwidth=0.254
PolygonConnect Polygon_F.Cu-Net-(U16-BOOST)-1_ConnectDirect [IsNamedPolygon('F.Cu-Net-(U16-BOOST)-1')] p584: connectstyle=Direct reliefconductorwidth=0.254 reliefentries=4 polygonreliefangle="90 Angle" airgapwidth=0.254
PolygonConnect Polygon_F.Cu-/HDMI/DDC_SCL-4_ConnectDirect [IsNamedPolygon('F.Cu-/HDMI/DDC_SCL-4')] p585: connectstyle=Direct reliefconductorwidth=0.254 reliefentries=4 polygonreliefangle="90 Angle" airgapwidth=0.254
PolygonConnect Polygon_F.Cu-/HDMI/TMDS_D1+-6_ConnectDirect [IsNamedPolygon('F.Cu-/HDMI/TMDS_D1+-6')] p586: connectstyle=Direct reliefconductorwidth=0.254 reliefentries=4 polygonreliefangle="90 Angle" airgapwidth=0.254
PolygonConnect "Polygon_F.Cu-/LattePanda Module/HSIO_8_TX+-1_ConnectDirect" [IsNamedPolygon('F.Cu-/LattePanda Module/HSIO_8_TX+-1')] p587: connectstyle=Direct reliefconductorwidth=0.254 reliefentries=4 polygonreliefangle="90 Angle" airgapwidth=0.254
PolygonConnect "Polygon_F.Cu-/LattePanda Module/SUSCLK_WIFI-7_ConnectDirect" [IsNamedPolygon('F.Cu-/LattePanda Module/SUSCLK_WIFI-7')] p588: connectstyle=Direct reliefconductorwidth=0.254 reliefentries=4 polygonreliefangle="90 Angle" airgapwidth=0.254
PolygonConnect Polygon_F.Cu-/HDMI/TMDS_D2+-4_ConnectDirect [IsNamedPolygon('F.Cu-/HDMI/TMDS_D2+-4')] p589: connectstyle=Direct reliefconductorwidth=0.254 reliefentries=4 polygonreliefangle="90 Angle" airgapwidth=0.254
PolygonConnect Polygon_F.Cu-Net-(Q4-D)-6_ConnectDirect [IsNamedPolygon('F.Cu-Net-(Q4-D)-6')] p590: connectstyle=Direct reliefconductorwidth=0.254 reliefentries=4 polygonreliefangle="90 Angle" airgapwidth=0.254
PolygonConnect Polygon_F.Cu-GND-133_ConnectDirect [IsNamedPolygon('F.Cu-GND-133')] p591: connectstyle=Direct reliefconductorwidth=0.254 reliefentries=4 polygonreliefangle="90 Angle" airgapwidth=0.254
PolygonConnect Polygon_F.Cu-Net-(D26-A)-3_ConnectDirect [IsNamedPolygon('F.Cu-Net-(D26-A)-3')] p592: connectstyle=Direct reliefconductorwidth=0.254 reliefentries=4 polygonreliefangle="90 Angle" airgapwidth=0.254
PolygonConnect Polygon_F.Cu-GND-132_ConnectDirect [IsNamedPolygon('F.Cu-GND-132')] p593: connectstyle=Direct reliefconductorwidth=0.254 reliefentries=4 polygonreliefangle="90 Angle" airgapwidth=0.254
PolygonConnect "Polygon_F.Cu-/Gigabit Ethernet/MDI1+-1_ConnectDirect" [IsNamedPolygon('F.Cu-/Gigabit Ethernet/MDI1+-1')] p594: connectstyle=Direct reliefconductorwidth=0.254 reliefentries=4 polygonreliefangle="90 Angle" airgapwidth=0.254
PolygonConnect Polygon_F.Cu-/HDMI/TMDS_D1--5_ConnectDirect [IsNamedPolygon('F.Cu-/HDMI/TMDS_D1--5')] p595: connectstyle=Direct reliefconductorwidth=0.254 reliefentries=4 polygonreliefangle="90 Angle" airgapwidth=0.254
PolygonConnect Polygon_F.Cu-GND-131_ConnectDirect [IsNamedPolygon('F.Cu-GND-131')] p596: connectstyle=Direct reliefconductorwidth=0.254 reliefentries=4 polygonreliefangle="90 Angle" airgapwidth=0.254
PolygonConnect "Polygon_F.Cu-/LattePanda Module/HSIO_10_RX-_ConnectDirect" [IsNamedPolygon('F.Cu-/LattePanda Module/HSIO_10_RX-')] p597: connectstyle=Direct reliefconductorwidth=0.254 reliefentries=4 polygonreliefangle="90 Angle" airgapwidth=0.254
PolygonConnect Polygon_F.Cu-/HDMI/TMDS_CK--3_ConnectDirect [IsNamedPolygon('F.Cu-/HDMI/TMDS_CK--3')] p598: connectstyle=Direct reliefconductorwidth=0.254 reliefentries=4 polygonreliefangle="90 Angle" airgapwidth=0.254
PolygonConnect "Polygon_F.Cu-/LattePanda Module/~{RST_SW}-1_ConnectDirect" [IsNamedPolygon('F.Cu-/LattePanda Module/~{RST_SW}-1')] p599: connectstyle=Direct reliefconductorwidth=0.254 reliefentries=4 polygonreliefangle="90 Angle" airgapwidth=0.254
PolygonConnect Polygon_F.Cu-Net-(U14-VDD)-2_ConnectDirect [IsNamedPolygon('F.Cu-Net-(U14-VDD)-2')] p600: connectstyle=Direct reliefconductorwidth=0.254 reliefentries=4 polygonreliefangle="90 Angle" airgapwidth=0.254
PolygonConnect Polygon_F.Cu-+3V3-56_ConnectDirect [IsNamedPolygon('F.Cu-+3V3-56')] p601: connectstyle=Direct reliefconductorwidth=0.254 reliefentries=4 polygonreliefangle="90 Angle" airgapwidth=0.254
PolygonConnect Polygon_F.Cu-+1V0-10_ConnectDirect [IsNamedPolygon('F.Cu-+1V0-10')] p602: connectstyle=Direct reliefconductorwidth=0.254 reliefentries=4 polygonreliefangle="90 Angle" airgapwidth=0.254
PolygonConnect "Polygon_F.Cu-/LattePanda Module/HSIO_0_TX--1_ConnectDirect" [IsNamedPolygon('F.Cu-/LattePanda Module/HSIO_0_TX--1')] p603: connectstyle=Direct reliefconductorwidth=0.254 reliefentries=4 polygonreliefangle="90 Angle" airgapwidth=0.254
PolygonConnect Polygon_F.Cu-Net-(J6-CT)-1_ConnectDirect [IsNamedPolygon('F.Cu-Net-(J6-CT)-1')] p604: connectstyle=Direct reliefconductorwidth=0.254 reliefentries=4 polygonreliefangle="90 Angle" airgapwidth=0.254
PolygonConnect Polygon_F.Cu-/GPIO/SOC_UART1_RX-4_ConnectDirect [IsNamedPolygon('F.Cu-/GPIO/SOC_UART1_RX-4')] p605: connectstyle=Direct reliefconductorwidth=0.254 reliefentries=4 polygonreliefangle="90 Angle" airgapwidth=0.254
PolygonConnect Polygon_F.Cu-/GPIO/SOC_UART1_TX-2_ConnectDirect [IsNamedPolygon('F.Cu-/GPIO/SOC_UART1_TX-2')] p606: connectstyle=Direct reliefconductorwidth=0.254 reliefentries=4 polygonreliefangle="90 Angle" airgapwidth=0.254
PolygonConnect Polygon_F.Cu-GND-130_ConnectDirect [IsNamedPolygon('F.Cu-GND-130')] p607: connectstyle=Direct reliefconductorwidth=0.254 reliefentries=4 polygonreliefangle="90 Angle" airgapwidth=0.254
PolygonConnect Polygon_F.Cu-+5V-10_ConnectDirect [IsNamedPolygon('F.Cu-+5V-10')] p608: connectstyle=Direct reliefconductorwidth=0.254 reliefentries=4 polygonreliefangle="90 Angle" airgapwidth=0.254
PolygonConnect Polygon_F.Cu-GND-129_ConnectDirect [IsNamedPolygon('F.Cu-GND-129')] p609: connectstyle=Direct reliefconductorwidth=0.254 reliefentries=4 polygonreliefangle="90 Angle" airgapwidth=0.254
PolygonConnect "Polygon_F.Cu-/M.2 E&M Key/CON_PCIE_TX_1--1_ConnectDirect" [IsNamedPolygon('F.Cu-/M.2 E&M Key/CON_PCIE_TX_1--1')] p610: connectstyle=Direct reliefconductorwidth=0.254 reliefentries=4 polygonreliefangle="90 Angle" airgapwidth=0.254
PolygonConnect Polygon_F.Cu-/HDMI/TMDS_D1+-5_ConnectDirect [IsNamedPolygon('F.Cu-/HDMI/TMDS_D1+-5')] p611: connectstyle=Direct reliefconductorwidth=0.254 reliefentries=4 polygonreliefangle="90 Angle" airgapwidth=0.254
PolygonConnect Polygon_F.Cu-Net-(J6-PadL1)-1_ConnectDirect [IsNamedPolygon('F.Cu-Net-(J6-PadL1)-1')] p612: connectstyle=Direct reliefconductorwidth=0.254 reliefentries=4 polygonreliefangle="90 Angle" airgapwidth=0.254
PolygonConnect Polygon_F.Cu-/USB2.0&USB3.0/CON_USB4_D_P-3_ConnectDirect [IsNamedPolygon('F.Cu-/USB2.0&USB3.0/CON_USB4_D_P-3')] p613: connectstyle=Direct reliefconductorwidth=0.254 reliefentries=4 polygonreliefangle="90 Angle" airgapwidth=0.254
PolygonConnect Polygon_F.Cu-GND-128_ConnectDirect [IsNamedPolygon('F.Cu-GND-128')] p614: connectstyle=Direct reliefconductorwidth=0.254 reliefentries=4 polygonreliefangle="90 Angle" airgapwidth=0.254
PolygonConnect Polygon_F.Cu-GND-127_ConnectDirect [IsNamedPolygon('F.Cu-GND-127')] p615: connectstyle=Direct reliefconductorwidth=0.254 reliefentries=4 polygonreliefangle="90 Angle" airgapwidth=0.254
PolygonConnect Polygon_F.Cu-VPullup-4_ConnectDirect [IsNamedPolygon('F.Cu-VPullup-4')] p616: connectstyle=Direct reliefconductorwidth=0.254 reliefentries=4 polygonreliefangle="90 Angle" airgapwidth=0.254
PolygonConnect Polygon_F.Cu-GND-126_ConnectDirect [IsNamedPolygon('F.Cu-GND-126')] p617: connectstyle=Direct reliefconductorwidth=0.254 reliefentries=4 polygonreliefangle="90 Angle" airgapwidth=0.254
PolygonConnect Polygon_F.Cu-/USB2.0&USB3.0/CON_USB4_SSRX_P-2_ConnectDirect [IsNamedPolygon('F.Cu-/USB2.0&USB3.0/CON_USB4_SSRX_P-2')] p618: connectstyle=Direct reliefconductorwidth=0.254 reliefentries=4 polygonreliefangle="90 Angle" airgapwidth=0.254
PolygonConnect "Polygon_F.Cu-/Gigabit Ethernet/LED1_1000_ConnectDirect" [IsNamedPolygon('F.Cu-/Gigabit Ethernet/LED1_1000')] p619: connectstyle=Direct reliefconductorwidth=0.254 reliefentries=4 polygonreliefangle="90 Angle" airgapwidth=0.254
PolygonConnect Polygon_F.Cu-GND-125_ConnectDirect [IsNamedPolygon('F.Cu-GND-125')] p620: connectstyle=Direct reliefconductorwidth=0.254 reliefentries=4 polygonreliefangle="90 Angle" airgapwidth=0.254
PolygonConnect Polygon_F.Cu-GND-124_ConnectDirect [IsNamedPolygon('F.Cu-GND-124')] p621: connectstyle=Direct reliefconductorwidth=0.254 reliefentries=4 polygonreliefangle="90 Angle" airgapwidth=0.254
PolygonConnect "Polygon_F.Cu-/Gigabit Ethernet/GbE_PCIe_RX+-1_ConnectDirect" [IsNamedPolygon('F.Cu-/Gigabit Ethernet/GbE_PCIe_RX+-1')] p622: connectstyle=Direct reliefconductorwidth=0.254 reliefentries=4 polygonreliefangle="90 Angle" airgapwidth=0.254
PolygonConnect Polygon_F.Cu-Net-(Q4-D)-5_ConnectDirect [IsNamedPolygon('F.Cu-Net-(Q4-D)-5')] p623: connectstyle=Direct reliefconductorwidth=0.254 reliefentries=4 polygonreliefangle="90 Angle" airgapwidth=0.254
PolygonConnect "Polygon_F.Cu-/Gigabit Ethernet/GbE_PCIe_TX+_ConnectDirect" [IsNamedPolygon('F.Cu-/Gigabit Ethernet/GbE_PCIe_TX+')] p624: connectstyle=Direct reliefconductorwidth=0.254 reliefentries=4 polygonreliefangle="90 Angle" airgapwidth=0.254
PolygonConnect Polygon_F.Cu-+3V3-55_ConnectDirect [IsNamedPolygon('F.Cu-+3V3-55')] p625: connectstyle=Direct reliefconductorwidth=0.254 reliefentries=4 polygonreliefangle="90 Angle" airgapwidth=0.254
PolygonConnect "Polygon_F.Cu-/LattePanda Module/HSIO_10_RX+_ConnectDirect" [IsNamedPolygon('F.Cu-/LattePanda Module/HSIO_10_RX+')] p626: connectstyle=Direct reliefconductorwidth=0.254 reliefentries=4 polygonreliefangle="90 Angle" airgapwidth=0.254
PolygonConnect Polygon_F.Cu-+3V3-54_ConnectDirect [IsNamedPolygon('F.Cu-+3V3-54')] p627: connectstyle=Direct reliefconductorwidth=0.254 reliefentries=4 polygonreliefangle="90 Angle" airgapwidth=0.254
PolygonConnect Polygon_F.Cu-/GPIO/SOC_UART0_RX-3_ConnectDirect [IsNamedPolygon('F.Cu-/GPIO/SOC_UART0_RX-3')] p628: connectstyle=Direct reliefconductorwidth=0.254 reliefentries=4 polygonreliefangle="90 Angle" airgapwidth=0.254
PolygonConnect Polygon_F.Cu-+3V3-53_ConnectDirect [IsNamedPolygon('F.Cu-+3V3-53')] p629: connectstyle=Direct reliefconductorwidth=0.254 reliefentries=4 polygonreliefangle="90 Angle" airgapwidth=0.254
PolygonConnect Polygon_F.Cu-Net-(U16-SW)-1_ConnectDirect [IsNamedPolygon('F.Cu-Net-(U16-SW)-1')] p630: connectstyle=Direct reliefconductorwidth=0.254 reliefentries=4 polygonreliefangle="90 Angle" airgapwidth=0.254
PolygonConnect "Polygon_F.Cu-/LattePanda Module/HSIO_2_RX+-1_ConnectDirect" [IsNamedPolygon('F.Cu-/LattePanda Module/HSIO_2_RX+-1')] p631: connectstyle=Direct reliefconductorwidth=0.254 reliefentries=4 polygonreliefangle="90 Angle" airgapwidth=0.254
PolygonConnect Polygon_F.Cu-+1V0-9_ConnectDirect [IsNamedPolygon('F.Cu-+1V0-9')] p632: connectstyle=Direct reliefconductorwidth=0.254 reliefentries=4 polygonreliefangle="90 Angle" airgapwidth=0.254
PolygonConnect Polygon_F.Cu-GND-123_ConnectDirect [IsNamedPolygon('F.Cu-GND-123')] p633: connectstyle=Direct reliefconductorwidth=0.254 reliefentries=4 polygonreliefangle="90 Angle" airgapwidth=0.254
PolygonConnect "Polygon_F.Cu-/Gigabit Ethernet/MDI0-_ConnectDirect" [IsNamedPolygon('F.Cu-/Gigabit Ethernet/MDI0-')] p634: connectstyle=Direct reliefconductorwidth=0.254 reliefentries=4 polygonreliefangle="90 Angle" airgapwidth=0.254
PolygonConnect Polygon_F.Cu-Net-(J5-VBUS1)-1_ConnectDirect [IsNamedPolygon('F.Cu-Net-(J5-VBUS1)-1')] p635: connectstyle=Direct reliefconductorwidth=0.254 reliefentries=4 polygonreliefangle="90 Angle" airgapwidth=0.254
PolygonConnect Polygon_F.Cu-/HDMI/HPD-3_ConnectDirect [IsNamedPolygon('F.Cu-/HDMI/HPD-3')] p636: connectstyle=Direct reliefconductorwidth=0.254 reliefentries=4 polygonreliefangle="90 Angle" airgapwidth=0.254
PolygonConnect "Polygon_F.Cu-/LattePanda Module/REFCLK0+-2_ConnectDirect" [IsNamedPolygon('F.Cu-/LattePanda Module/REFCLK0+-2')] p637: connectstyle=Direct reliefconductorwidth=0.254 reliefentries=4 polygonreliefangle="90 Angle" airgapwidth=0.254
PolygonConnect Polygon_F.Cu-+12V-4_ConnectDirect [IsNamedPolygon('F.Cu-+12V-4')] p638: connectstyle=Direct reliefconductorwidth=0.254 reliefentries=4 polygonreliefangle="90 Angle" airgapwidth=0.254
PolygonConnect "Polygon_F.Cu-/LattePanda Module/REFCLK2+-1_ConnectDirect" [IsNamedPolygon('F.Cu-/LattePanda Module/REFCLK2+-1')] p639: connectstyle=Direct reliefconductorwidth=0.254 reliefentries=4 polygonreliefangle="90 Angle" airgapwidth=0.254
PolygonConnect Polygon_F.Cu-GND-122_ConnectDirect [IsNamedPolygon('F.Cu-GND-122')] p640: connectstyle=Direct reliefconductorwidth=0.254 reliefentries=4 polygonreliefangle="90 Angle" airgapwidth=0.254
PolygonConnect Polygon_F.Cu-Net-(A1-~{BIOS_SEL})-1_ConnectDirect [IsNamedPolygon('F.Cu-Net-(A1-~{BIOS_SEL})-1')] p641: connectstyle=Direct reliefconductorwidth=0.254 reliefentries=4 polygonreliefangle="90 Angle" airgapwidth=0.254